# Altium PCB alertButton.PcbDoc (part 2 of 2)
Units mm, origin at the board's own origin, x right, y up, seen from the top; angles counter-clockwise.
Board outline 28.5 x 30 mm, 6 copper layers (Top Layer, Layer 1, Layer 2, Layer 3, Layer 4, Bottom Layer), stack 1.032 mm thick; 73 components, 33 nets, 250 pads, 221 vias.
Unrouted connection lines stored in the file: 13.
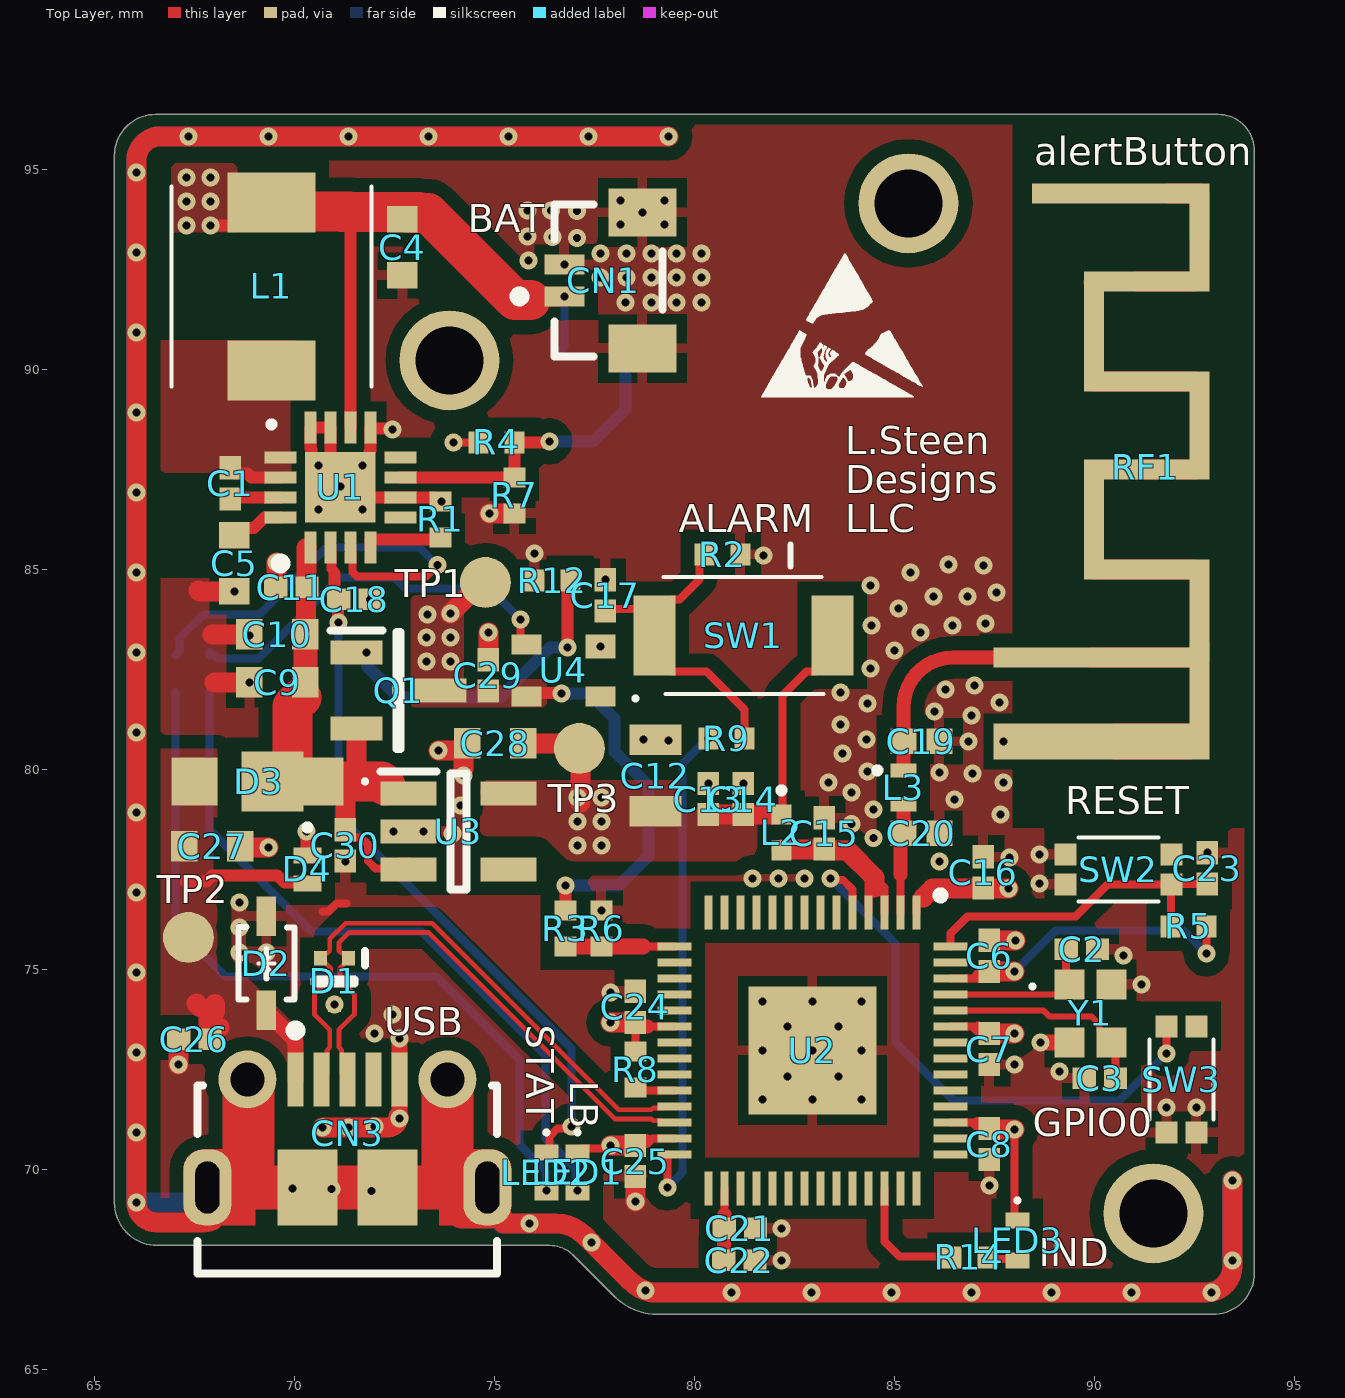
[diagram p0: Top Layer view]

## Other copper (continued)
Layer 4: (continued)
  pour cut-out: 64.794,97.65 66.856,97.65 66.856,70.875 67.894,70.875 cw(c67.894,69.975) 68.794,69.975 ccw(c68.969,69.975) 68.969,69.8 76.769,69.8 cw(c76.77,68.776) 77.494,69.5 78.675,68.319 ccw(c80.471,70.115) 80.471,67.575 90.569,67.575 cw(c90.569,67.35) 90.794,67.35 90.794,66.025 cw(c90.594,66.025) 90.594,65.825 66.169,65.825 cw(c66.169,67.2) 64.794,67.2
  pour cut-out: 80.025,95.3 cw(c79.925,95.3) 79.925,95.2 68,95.2 cw(c68,95.4) 67.8,95.4 67.8,96.6 cw(c67.95,96.6) 67.95,96.75 79.95,96.75 cw(c79.95,96.675) 80.025,96.675

## Silkscreen, mask and mechanical layers (free items; w line width, h text height)
Top Overlay:
  drawing of 4 lines, arcs and shapes, not listed
  text "alertButton" at 88.5,95.1 h0.7
  text "L.Steen" at 83.775,87.875 h0.7
  text "Designs" at 83.775,86.908 h0.7
  text "LLC" at 83.775,85.925 h0.7
Top Paste:
  circle w0.3: c68.825,72.25 r0.575
  circle w0.3: c73.825,72.25 r0.575
Dimensions:
  circle w0.15: c91.475,68.9 r1.5
Board Outline:
  lines w0.15: 65.5,69.167 ccw(c66.567,69.167) 66.567,68.1 76.375,68.1 cw(c76.375,67.255) 76.972,67.853 78.006,66.819 ccw(c79.078,67.89) 79.078,66.375 92.961,66.375 ccw(c92.961,67.414) 94,67.414 94,95.47 ccw(c93.095,95.47) 93.095,96.375 66.53,96.375 ccw(c66.53,95.345) 65.5,95.345 65.5,69.55 65.5,69.167

## Dimensions
71.325,72.25 to 71,64.725 on Dimensions
79.35,95.825 to 65.5,96.375 on Dimensions
76.687,69.923 to 65.5,69.167 on Dimensions
76.687,69.923 to 79.078,66.375 on Dimensions
77.075,70.425 to 76.3,70.425 on Dimensions
65.5,100.075 to 66.3,99.575 on Dimensions
93.095,96.375 to 94.45,78.65 on Dimensions
87.975,107.225 to 94,95.47 on Dimensions
100.1,66.375 to 66.567,68.1 on Dimensions
90.5,104.9 to 87.975,82.275 on Dimensions
65.5,102.925 to 90.5,104.9 on Dimensions
87.475,81.25 to 87.975,82.275 on Dimensions
94,66.375 to 101.675,81.375 on Dimensions
65.5,96.375 to 79.75,98.725 on Dimensions
94,102.825 to 93.7,101.1 on Dimensions
65.5,96.375 to 65.5,96.075 on Dimensions
66.45,66.375 to 62.75,96.375 on Dimensions
65.5,67.4 to 94,64.525 on Dimensions
65.8,67.175 to 65.5,67.4 on Dimensions
66.4,66.675 to 66.45,66.375 on Dimensions

## Text inside footprints (layer, text, board x,y; h text height)
CN3: Mechanical 1 "PCB EDGE" at 64.125,68 h0.3